# Altium PCB DigitSegment_PCB.PcbDoc
Units mm, origin at the board's own origin, x right, y up, seen from the top; angles counter-clockwise.
Board outline 152.4 x 101.6 mm, 2 copper layers (Top Layer, Bottom Layer); 121 components, 21 nets, 360 pads, 65 vias.
Unrouted connection lines stored in the file: 177.
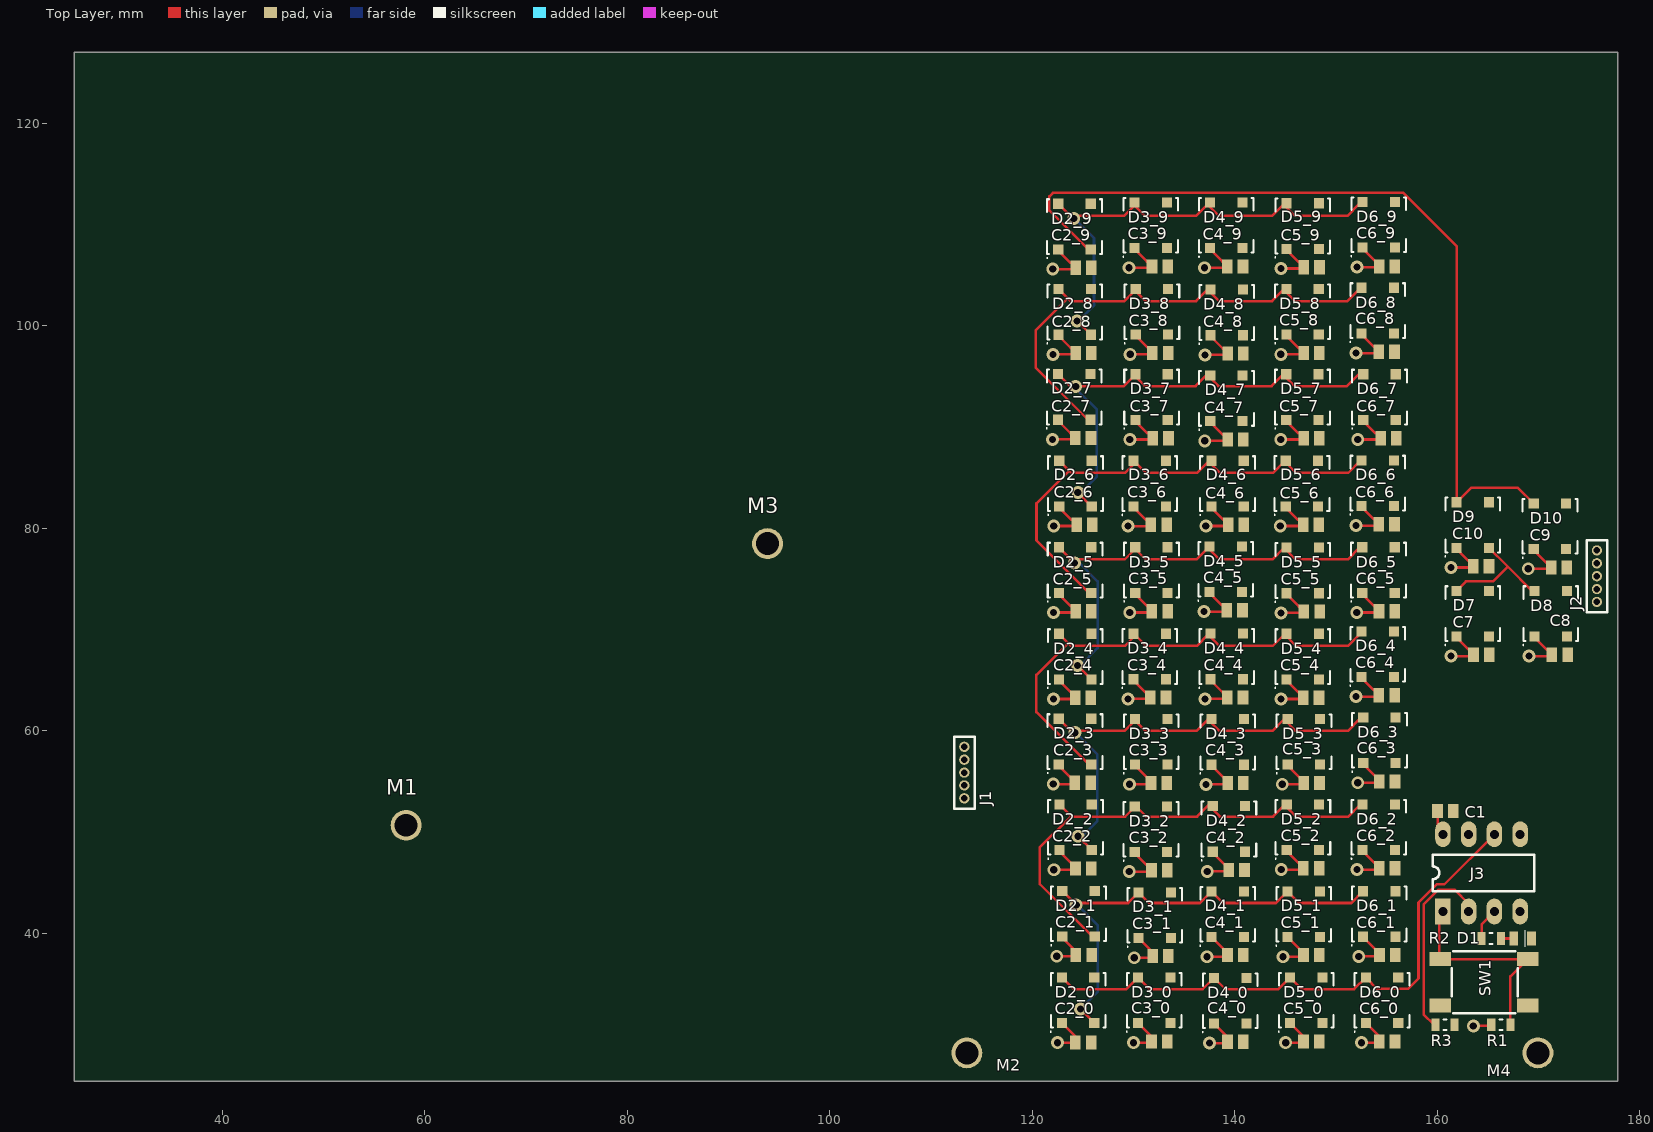
[diagram p0: Top Layer view]
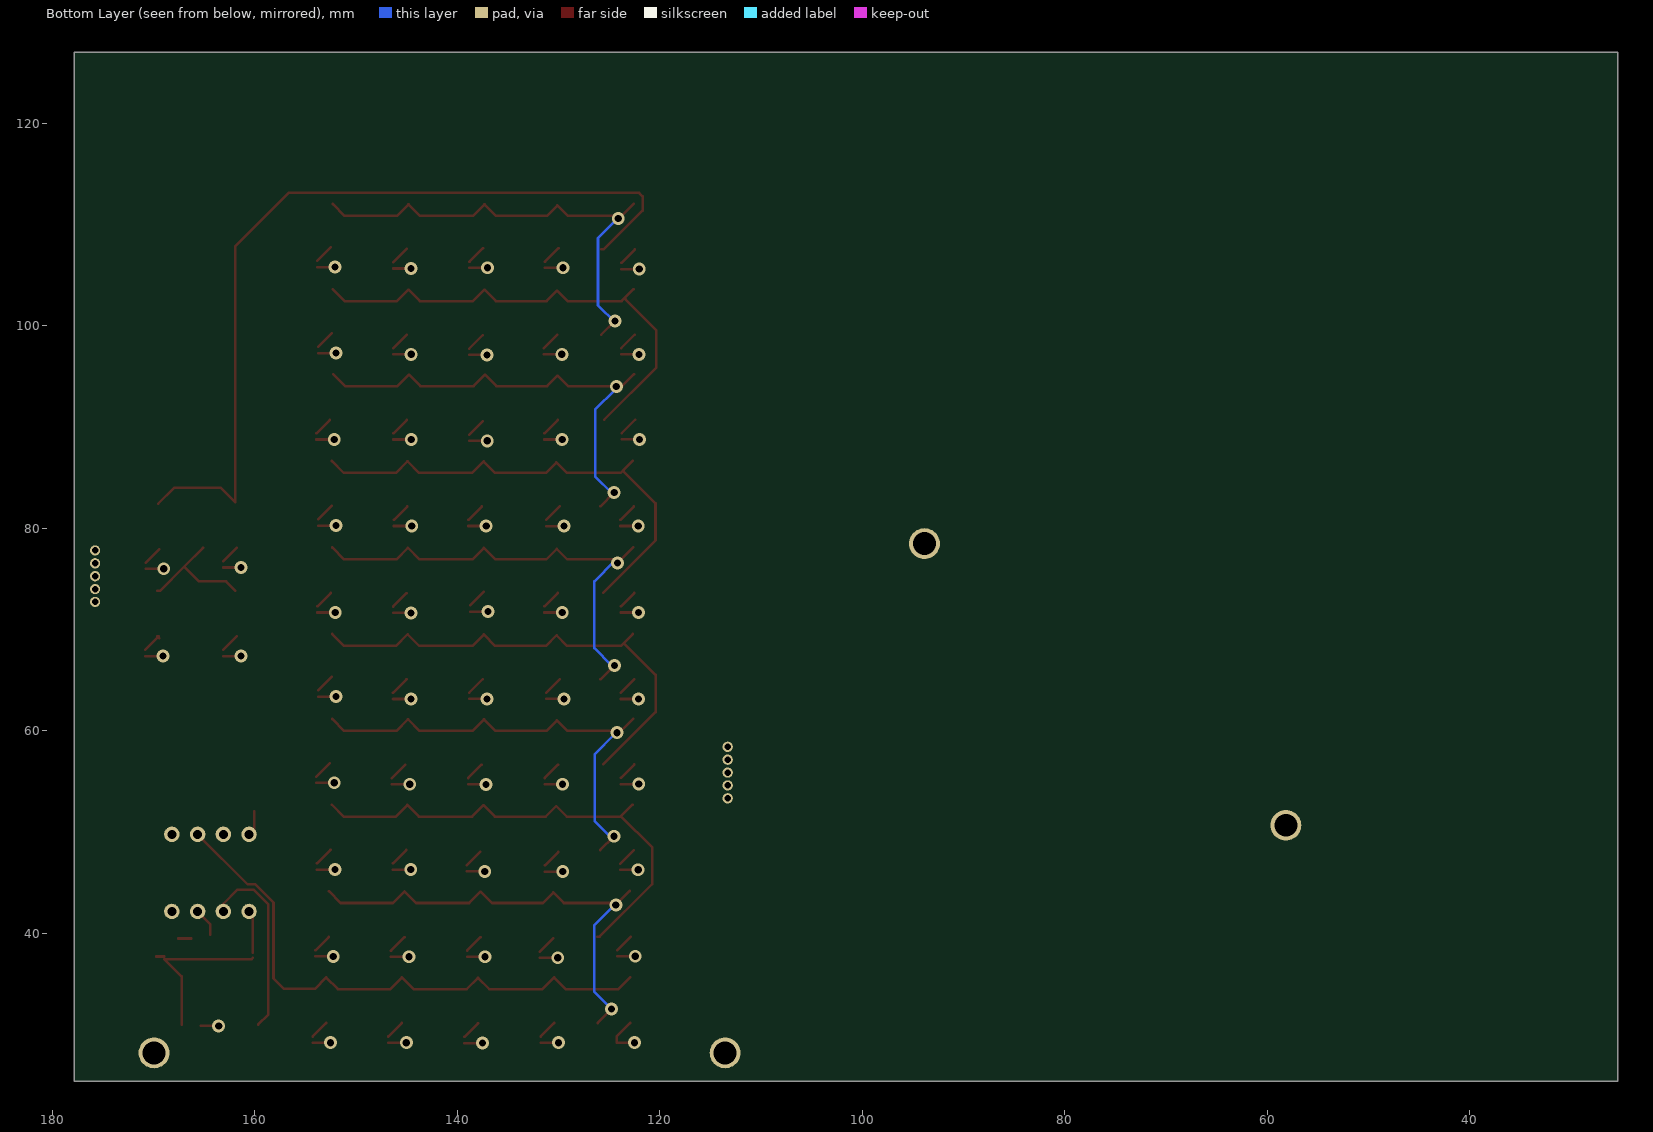
[diagram p1: Bottom Layer view, seen from below]
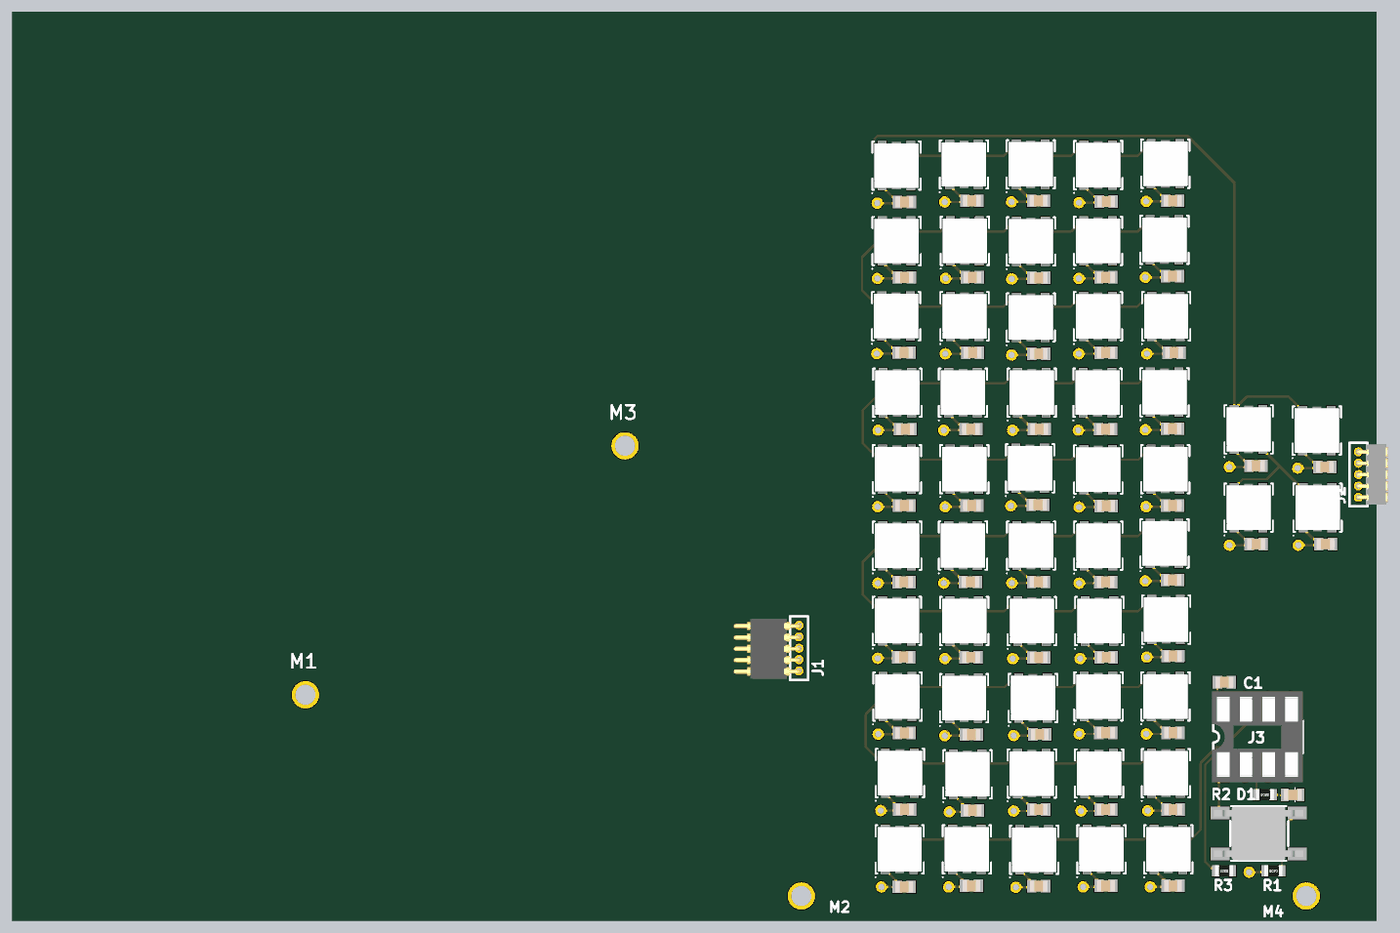
[diagram p2: 3D render of the assembled board from above, using the file's embedded part models]

## Layer stack, top to bottom
Top Solder: solder mask 0.0102, Solder Resist, Dk 3.5
Top Layer: signal copper 0.0356
Dielectric 1: dielectric 0.32, FR-4, Dk 4.8
Bottom Layer: signal copper 0.0356
Bottom Solder: solder mask 0.0102, Solder Resist, Dk 3.5

## Board outline
25.4,25.4 177.8,25.4 177.8,127 25.4,127

## Design rules (kind name [scope] priority, off if disabled: settings)
Clearance [All] p1: gap=0.254 ignorepadtopadclearanceinfootprint=FALSE except(0: Arc-Hole Track-Hole SMDPad-Hole THPad-Hole Via-Hole Fill-Hole Poly-Hole Region-Hole Text-Hole)
PolygonConnect [All] p1: connectstyle=Relief reliefconductorwidth=0.254 reliefentries=4 polygonreliefangle="90 Angle" airgapwidth=0.254
RoutingVias [All] p1: holewidth=0.711 width=1.27 viastyle="Through Hole" minholewidth=0.711 minwidth=1.27 maxholewidth=0.711 maxwidth=1.27
SolderMaskExpansion [All] p1: expansion=0.102
Width [All] p1: maxlimit=0.254 minlimit=0.254 preferedwidth=0.254
30 further rules are at their usual default settings.

## Classes and differential pairs
channel class ParralelLEDStrip: 0 1 2 3 4 5 6 7 8 9 Segment-' Segment-.
component class 9: C2_9 C3_9 C3_Segment-9 C4_9 C4_Segment-9 C5_9 C5_Segment-9 C6_9 C6_Segment-9 D2_9 D3_9 D3_Segment-9 D4_9 D4_Segment-9 D5_9 D5_Segment-9 D6_9 D6_Segment-9
component class 8: C2_8 C3_8 C3_Segment-8 C4_8 C4_Segment-8 C5_8 C5_Segment-8 C6_8 C6_Segment-8 D2_8 D3_8 D3_Segment-8 D4_8 D4_Segment-8 D5_8 D5_Segment-8 D6_8 D6_Segment-8
component class 7: C2_7 C3_7 C3_Segment-7 C4_7 C4_Segment-7 C5_7 C5_Segment-7 C6_7 C6_Segment-7 D2_7 D3_7 D3_Segment-7 D4_7 D4_Segment-7 D5_7 D5_Segment-7 D6_7 D6_Segment-7
component class 6: C2_6 C3_6 C3_Segment-6 C4_6 C4_Segment-6 C5_6 C5_Segment-6 C6_6 C6_Segment-6 D2_6 D3_6 D3_Segment-6 D4_6 D4_Segment-6 D5_6 D5_Segment-6 D6_Segment-6
component class 5: C2_5 C3_5 C3_Segment-5 C4_5 C4_Segment-5 C5_5 C5_Segment-5 C6_5 C6_Segment-5 D2_5 D3_5 D3_Segment-5 D4_5 D4_Segment-5 D5_5 D5_Segment-5 D6_5 D6_Segment-5
component class 4: C2_4 C3_4 C3_Segment-4 C4_4 C4_Segment-4 C5_4 C5_Segment-4 C6_4 C6_Segment-4 D2_4 D3_4 D3_Segment-4 D4_4 D4_Segment-4 D5_4 D5_Segment-4 D6_4 D6_Segment-4
component class 3: C2_3 C3_3 C3_Segment-3 C4_3 C4_Segment-3 C5_3 C5_Segment-3 C6_3 C6_Segment-3 D2_3 D3_3 D3_Segment-3 D4_3 D4_Segment-3 D5_3 D5_Segment-3 D6_3 D6_Segment-3
component class 2: C2_2 C3_2 C3_Segment-2 C4_2 C4_Segment-2 C5_2 C5_Segment-2 C6_2 C6_Segment-2 D2_2 D3_2 D3_Segment-2 D4_2 D4_Segment-2 D5_2 D5_Segment-2 D6_2 D6_Segment-2
component class 1: C2_1 C2_Segment-1 C3_1 C3_Segment-1 C4_1 C4_Segment-1 C5_1 C5_Segment-1 C6_1 D2_1 D3_1 D3_Segment-1 D4_1 D4_Segment-1 D5_1 D5_Segment-1 D6_1 D6_Segment-1
component class 0: C2_0 C3_0 C3_Segment-0 C4_0 C4_Segment-0 C5_0 C5_Segment-0 C6_0 C6_Segment-0 D2_0 D3_0 D3_Segment-0 D4_0 D4_Segment-0 D5_0 D5_Segment-0 D6_0 D6_Segment-0
component class DigitSegment_Schematic: C1 C7 C8 C9 C10 D1 D7 D8 D9 D10 J1 J2 J3 J? M1 M2 M3 M4 M? R1 R2 R3 R?

## Components (designator, comment, footprint, x,y, rotation, side; value= is the part's Value field where it differs from the comment)
C1 "__template_cap" C0805 160.785,52.07 r0 top
C2_0 "__template_cap" C0805 125.027,29.21 r0 top (schematic designator C2)
C2_1 "__template_cap" C0805 125.079,37.868 r0 top (schematic designator C2)
C2_2 "__template_cap" C0805 125.031,46.404 r0 top (schematic designator C2)
C2_3 "__template_cap" C0805 124.975,54.873 r0 top (schematic designator C2)
C2_4 "__template_cap" C0805 125.001,63.267 r0 top (schematic designator C2)
C2_5 "__template_cap" C0805 125.046,71.808 r0 top (schematic designator C2)
C2_6 "__template_cap" C0805 125.149,80.349 r0 top (schematic designator C2)
C2_7 "__template_cap" C0805 125.016,88.903 r0 top (schematic designator C2)
C2_8 "__template_cap" C0805 125.053,97.295 r0 top (schematic designator C2)
C2_9 "__template_cap" C0805 125.053,105.725 r0 top (schematic designator C2)
C3_0 "__template_cap" C0805 132.536,29.337 r0 top (schematic designator C3)
C3_1 "__template_cap" C0805 132.659,37.759 r0 top (schematic designator C3)
C3_2 "__template_cap" C0805 132.537,46.227 r0 top (schematic designator C3)
C3_3 "__template_cap" C0805 132.493,54.849 r0 top (schematic designator C3)
C3_4 "__template_cap" C0805 132.42,63.277 r0 top (schematic designator C3)
C3_5 "__template_cap" C0805 132.583,71.808 r0 top (schematic designator C3)
C3_6 "__template_cap" C0805 132.484,80.348 r0 top (schematic designator C3)
C3_7 "__template_cap" C0805 132.663,88.89 r0 top (schematic designator C3)
C3_8 "__template_cap" C0805 132.631,97.304 r0 top (schematic designator C3)
C3_9 "__template_cap" C0805 132.589,105.85 r0 top (schematic designator C3)
C4_0 "__template_cap" C0805 140.045,29.297 r0 top (schematic designator C4)
C4_1 "__template_cap" C0805 140.049,37.851 r0 top (schematic designator C4)
C4_2 "__template_cap" C0805 140.172,46.25 r0 top (schematic designator C4)
C4_3 "__template_cap" C0805 140.059,54.839 r0 top (schematic designator C4)
C4_4 "__template_cap" C0805 140.023,63.279 r0 top (schematic designator C4)
C4_5 "__template_cap" C0805 139.978,71.901 r0 top (schematic designator C4)
C4_6 "__template_cap" C0805 140.103,80.349 r0 top (schematic designator C4)
C4_7 "__template_cap" C0805 140.058,88.761 r0 top (schematic designator C4)
C4_8 "__template_cap" C0805 140.059,97.25 r0 top (schematic designator C4)
C4_9 "__template_cap" C0805 140.032,105.85 r0 top (schematic designator C4)
C5_0 "__template_cap" C0805 147.554,29.337 r0 top (schematic designator C5)
C5_1 "__template_cap" C0805 147.545,37.859 r0 top (schematic designator C5)
C5_2 "__template_cap" C0805 147.542,46.427 r0 top (schematic designator C5)
C5_3 "__template_cap" C0805 147.583,54.849 r0 top (schematic designator C5)
C5_4 "__template_cap" C0805 147.534,63.267 r0 top (schematic designator C5)
C5_5 "__template_cap" C0805 147.587,71.774 r0 top (schematic designator C5)
C5_6 "__template_cap" C0805 147.509,80.35 r0 top (schematic designator C5)
C5_7 "__template_cap" C0805 147.558,88.89 r0 top (schematic designator C5)
C5_8 "__template_cap" C0805 147.558,97.304 r0 top (schematic designator C5)
C5_9 "__template_cap" C0805 147.584,105.77 r0 top (schematic designator C5)
C6_0 "__template_cap" C0805 155.038,29.337 r0 top (schematic designator C6)
C6_1 "__template_cap" C0805 155.058,37.851 r0 top (schematic designator C6)
C6_2 "__template_cap" C0805 155.039,46.427 r0 top (schematic designator C6)
C6_3 "__template_cap" C0805 155.039,55 r0 top (schematic designator C6)
C6_4 "__template_cap" C0805 154.994,63.507 r0 top (schematic designator C6)
C6_5 "__template_cap" C0805 155.007,71.808 r0 top (schematic designator C6)
C6_6 "__template_cap" C0805 154.982,80.397 r0 top (schematic designator C6)
C6_7 "__template_cap" C0805 155.168,88.89 r0 top (schematic designator C6)
C6_8 "__template_cap" C0805 154.99,97.431 r0 top (schematic designator C6)
C6_9 "__template_cap" C0805 155.025,105.848 r0 top (schematic designator C6)
C7 "__template_cap" C0805 164.33,67.511 r0 top
C8 "__template_cap" C0805 172.077,67.511 r0 top
C9 "__template_cap" C0805 172,76.126 r0 top
C10 "__template_cap" C0805 164.316,76.253 r0 top
D1 "LED_LY971" 0805_Diode 168.164,39.497 r180 top
D2_0 "LED_WS2812B" 4DFN5X5_WGS2812B 124.519,33.401 r90 top (schematic designator D2)
D2_1 "LED_WS2812B" 4DFN5X5_WGS2812B 124.558,41.932 r90 top (schematic designator D2)
D2_2 "LED_WS2812B" 4DFN5X5_WGS2812B 124.269,50.468 r90 top (schematic designator D2)
D2_3 "LED_WS2812B" 4DFN5X5_WGS2812B 124.213,58.937 r90 top (schematic designator D2)
D2_4 "LED_WS2812B" 4DFN5X5_WGS2812B 124.239,67.331 r90 top (schematic designator D2)
D2_5 "LED_WS2812B" 4DFN5X5_WGS2812B 124.221,75.872 r90 top (schematic designator D2)
D2_6 "LED_WS2812B" 4DFN5X5_WGS2812B 124.26,84.413 r90 top (schematic designator D2)
D2_7 "LED_WS2812B" 4DFN5X5_WGS2812B 124.127,92.967 r90 top (schematic designator D2)
D2_8 "LED_WS2812B" 4DFN5X5_WGS2812B 124.177,101.359 r90 top (schematic designator D2)
D2_9 "LED_WS2812B" 4DFN5X5_WGS2812B 124.164,109.789 r90 top (schematic designator D2)
D3_0 "LED_WS2812B" 4DFN5X5_WGS2812B 132.028,33.401 r90 top (schematic designator D3)
D3_1 "LED_WS2812B" 4DFN5X5_WGS2812B 132.1,41.787 r90 top (schematic designator D3)
D3_2 "LED_WS2812B" 4DFN5X5_WGS2812B 131.712,50.291 r90 top (schematic designator D3)
D3_3 "LED_WS2812B" 4DFN5X5_WGS2812B 131.731,58.913 r90 top (schematic designator D3)
D3_4 "LED_WS2812B" 4DFN5X5_WGS2812B 131.595,67.341 r90 top (schematic designator D3)
D3_5 "LED_WS2812B" 4DFN5X5_WGS2812B 131.758,75.872 r90 top (schematic designator D3)
D3_6 "LED_WS2812B" 4DFN5X5_WGS2812B 131.595,84.412 r90 top (schematic designator D3)
D3_7 "LED_WS2812B" 4DFN5X5_WGS2812B 131.774,92.954 r90 top (schematic designator D3)
D3_8 "LED_WS2812B" 4DFN5X5_WGS2812B 131.806,101.368 r90 top (schematic designator D3)
D3_9 "LED_WS2812B" 4DFN5X5_WGS2812B 131.7,109.914 r90 top (schematic designator D3)
D4_0 "LED_WS2812B" 4DFN5X5_WGS2812B 139.537,33.361 r90 top (schematic designator D4)
D4_1 "LED_WS2812B" 4DFN5X5_WGS2812B 139.287,41.879 r90 top (schematic designator D4)
D4_2 "LED_WS2812B" 4DFN5X5_WGS2812B 139.41,50.314 r90 top (schematic designator D4)
D4_3 "LED_WS2812B" 4DFN5X5_WGS2812B 139.297,58.903 r90 top (schematic designator D4)
D4_4 "LED_WS2812B" 4DFN5X5_WGS2812B 139.198,67.343 r90 top (schematic designator D4)
D4_5 "LED_WS2812B" 4DFN5X5_WGS2812B 139.089,75.965 r90 top (schematic designator D4)
D4_6 "LED_WS2812B" 4DFN5X5_WGS2812B 139.278,84.413 r90 top (schematic designator D4)
D4_7 "LED_WS2812B" 4DFN5X5_WGS2812B 139.169,92.825 r90 top (schematic designator D4)
D4_8 "LED_WS2812B" 4DFN5X5_WGS2812B 139.183,101.314 r90 top (schematic designator D4)
D4_9 "LED_WS2812B" 4DFN5X5_WGS2812B 139.156,109.922 r90 top (schematic designator D4)
D5_0 "LED_WS2812B" 4DFN5X5_WGS2812B 147.046,33.401 r90 top (schematic designator D5)
D5_1 "LED_WS2812B" 4DFN5X5_WGS2812B 146.796,41.887 r90 top (schematic designator D5)
D5_2 "LED_WS2812B" 4DFN5X5_WGS2812B 146.717,50.491 r90 top (schematic designator D5)
D5_3 "LED_WS2812B" 4DFN5X5_WGS2812B 146.821,58.913 r90 top (schematic designator D5)
D5_4 "LED_WS2812B" 4DFN5X5_WGS2812B 146.709,67.331 r90 top (schematic designator D5)
D5_5 "LED_WS2812B" 4DFN5X5_WGS2812B 146.698,75.838 r90 top (schematic designator D5)
D5_6 "LED_WS2812B" 4DFN5X5_WGS2812B 146.62,84.414 r90 top (schematic designator D5)
D5_7 "LED_WS2812B" 4DFN5X5_WGS2812B 146.669,92.954 r90 top (schematic designator D5)
D5_8 "LED_WS2812B" 4DFN5X5_WGS2812B 146.682,101.368 r90 top (schematic designator D5)
D5_9 "LED_WS2812B" 4DFN5X5_WGS2812B 146.695,109.842 r90 top (schematic designator D5)
D6_0 "LED_WS2812B" 4DFN5X5_WGS2812B 154.53,33.401 r90 top (schematic designator D6)
D6_1 "LED_WS2812B" 4DFN5X5_WGS2812B 154.258,41.915 r90 top (schematic designator D6)
D6_2 "LED_WS2812B" 4DFN5X5_WGS2812B 154.214,50.491 r90 top (schematic designator D6)
D6_3 "LED_WS2812B" 4DFN5X5_WGS2812B 154.277,59.064 r90 top (schematic designator D6)
D6_4 "LED_WS2812B" 4DFN5X5_WGS2812B 154.105,67.571 r90 top (schematic designator D6)
D6_5 "LED_WS2812B" 4DFN5X5_WGS2812B 154.182,75.872 r90 top (schematic designator D6)
D6_6 "LED_WS2812B" 4DFN5X5_WGS2812B 154.106,84.461 r90 top (schematic designator D6)
D6_7 "LED_WS2812B" 4DFN5X5_WGS2812B 154.279,92.954 r90 top (schematic designator D6)
D6_8 "LED_WS2812B" 4DFN5X5_WGS2812B 154.101,101.495 r90 top (schematic designator D6)
D6_9 "LED_WS2812B" 4DFN5X5_WGS2812B 154.207,109.984 r90 top (schematic designator D6)
D7 "LED_WS2812B" 4DFN5X5_WGS2812B 163.492,71.575 r90 top
D8 "LED_WS2812B" 4DFN5X5_WGS2812B 171.188,71.575 r90 top
D9 "LED_WS2812B" 4DFN5X5_WGS2812B 163.491,80.317 r90 top
D10 "LED_WS2812B" 4DFN5X5_WGS2812B 171.111,80.19 r90 top
J1 "CONN_1X5_MALE_POGO" CONN_1X5_MALE_POGO 113.284,55.88 r90 top
J2 "CONN_1X5_FEMALE_POGO" CONN_1X5_FEMALE_POGO 175.75,75.27 r270 top
J3 "ATTINY85 DIP" DIP8 158.544,40.164 r90 top
M1 "SCREW_#2-56_5/16" #2_HOLE 58.166,50.673 r0 top
M2 "SCREW_#2-56_5/16" #2_HOLE 113.538,28.194 r0 top
M3 "SCREW_#2-56_5/16" #2_HOLE 93.853,78.486 r0 top
M4 "SCREW_#2-56_5/16" #2_HOLE 169.926,28.194 r0 top
R1 "__template_resistor" R0805 166.259,30.988 r180 top
R2 "__template_resistor" R0805 165.309,39.497 r180 top
R3 "__template_resistor" R0805 160.75,30.988 r180 top
SW1 "SWITCH_FSM4JSMATR" SWITCH_FSM4JSMATR 164.608,35.179 r270 top

## Footprints (in the part's own frame and the unit in brackets; to place one, negate y for a bottom-side part, rotate by r counter-clockwise, add the part's x,y. Pads: shape width x height; smd on the part's side, far side on the other; paste and mask are expansions set on the pad)
4DFN5X5_WGS2812B [mm] "WS2812B LED 4DFN5X5"
  rect 1x1 smd: 1(-2.25,1.6) 2(-2.25,-1.6) 3(2.25,-1.6) 4(2.25,1.6)
  silkscreen extent -3.15,-2.7 2.7,2.75, body extent -2.68,-2.47 2.67,2.48, height 2
0805_Diode [mm]
  rect 0.85x1.4 smd: 1(-1.129,0) 2(0.621,0)
  silkscreen extent -0.5,-0.8 -0.5,0.8, body extent -1.25,-0.62 0.75,0.63, height 0.59
#2_HOLE [mil] "Standard #2 Clearance Hole"
  round 120 hole 89: HOLE(0,0)
C0805 [mm] "Chip Capacitor, 2-Leads, Body 2.0x1.3mm, IPC High Density"
  rect 1.05x1.4 smd: 1(-0.775,0) 2(0.775,0)
  body extent -1,-0.62 1,0.63, height 0.6
CONN_1X5_FEMALE_POGO [mil]
  round 40 hole 25: 1(-100,0) 2(-50,0) 3(0,0) 4(50,0) 5(100,0)
  silkscreen extent -140,-40 140,40, body extent -132,-10 132,130, height 97
CONN_1X5_MALE_POGO [mil]
  round 40 hole 25: 1(-100,0) 2(-50,0) 3(0,0) 4(50,0) 5(100,0)
  silkscreen extent -140,-40 140,40, body extent -135,-8 130,288, height 97
DIP8 [mm]
  rect 2.54x1.524 / inner round 1.524 / far side round 1.524 hole 0.889: 1(2,-2)
  oval 2.54x1.524 / inner round 1.524 / far side round 1.524 hole 0.889: 2(2,-4.54) 3(2,-7.08) 4(2,-9.62) 5(9.62,-9.62) 6(9.62,-7.08) 7(9.62,-4.54) 8(9.62,-2)
  silkscreen extent 4,-11 7.62,-1, body extent 0.73,-11 10.89,-0.84, height 5
R0805 [mm] "Chip Resistor, 2-Leads, Body 2.0x1.3mm, IPC High Density"
  rect 0.8x1.25 smd: 1(-0.95,0) 2(0.95,0)
  silkscreen extent -0.15,-0.53 0.15,0.53, body extent -1,-0.62 1,0.63, height 0.6
SWITCH_FSM4JSMATR [mil]
  rect 55x83 smd: 1(90,170) 1(90,-170) 2(-90,170) 2(-90,-170)
  silkscreen extent -120,-125 120,130, body extent -118,-197 118,197, height 197

## Part data
C1 C2_0 C2_1 C2_2 C2_3 C2_4 C2_5 C2_6 C2_7 C2_8 C2_9 C3_0 C3_1 C3_2 C3_3 C3_4 C3_5 C3_6 C3_7 C3_8 C3_9 C4_0 C4_1 C4_2 C4_3 C4_4 C4_5 C4_6 C4_7 C4_8 C4_9 C5_0 C5_1 C5_2 C5_3 C5_4 C5_5 C5_6 C5_7 C5_8 C5_9 C6_0 C6_1 C6_2 C6_3 C6_4 C6_5 C6_6 C6_7 C6_8 C6_9 C7 C8 C9 C10: library part "CAP CER 10000PF 50V X7R 0805", Capacitance (shorthand)=10000pF, Capacitance - pF (Machine readable)=10000, Dielectric=X7R, Manufacturer="Murata Electronics North America", Rated Voltage=50V, Supplier Part Number 1=490-1664-1-ND, type=capacitor
D1: "LED 0805 GREEN 20MA", Color=Green, Current - Test=20mA, Lens Color=White, Manufacturer="OSRAM Opto Semiconductors Inc", Manufacturer Part Number="LG R971-KN-1", Millicandela Rating=26.05mcd, Package / Case="0805 (2012 Metric)", Supplier Part Number 1=475-1410-1-ND, Voltage - Forward (Vf) (Typ)=2.2V, Category=Optoelectronics, ComponentLink1Description=http://www.osram-os.com/Graphics/XPic9/00078860_0.pdf, ComponentLink1URL=http://www.osram-os.com/Graphics/XPic9/00078860_0.pdf, Height (Max)=0.80mm, Lens Style/Size="Rectangle with Flat Top, 1.30mm x 1.25mm", Lens Transparency=Diffused, Mounting Type="Surface Mount", Packaging="Cut Tape (CT)", Pricing 1="1=0.08, 10=0.069, 100=0.0548, 250=0.04796, 500=0.04384 (USD)", RoHS="RoHS Compliant", Size / Dimension="2.00mm L x 1.25mm W", Stock 1=89733, Supplier 1=Digi-Key, Viewing Angle=160°, Wavelength - Dominant=570nm, Wavelength - Peak=572nm
D2_0 D2_1 D2_2 D2_3 D2_4 D2_5 D2_6 D2_7 D2_8 D2_9 D3_0 D3_1 D3_2 D3_3 D3_4 D3_5 D3_6 D3_7 D3_8 D3_9 D4_0 D4_1 D4_2 D4_3 D4_4 D4_5 D4_6 D4_7 D4_8 D4_9 D5_0 D5_1 D5_2 D5_3 D5_4 D5_5 D5_6 D5_7 D5_8 D5_9 D6_0 D6_1 D6_2 D6_3 D6_4 D6_5 D6_6 D6_7 D6_8 D6_9 D7 D8 D9 D10: "LED RGB WS2812B"
J1: "RIGHT ANGLE .050\" GRID SLC"
J2: ".050\" RA TARGET CONNECTOR"
J3: library part CONN_DIP_8, "CONN IC SOCKET 8POS DIP TIN", Contact Resistance="30 mOhm", Manufacturer="Assmann WSW Components", Manufacturer Part Number="A 08-LC-TT", Material Flammability Rating="UL94 V-0", Operating Temperature="-55°C ~ 85°C", Supplier Part Number 1=AE9986-ND, Category="Connectors, Interconnects", ComponentLink1Description=http://www.assmann-wsw.com/fileadmin/datasheets/ASS_0810_CO.pdf, ComponentLink1URL=http://www.assmann-wsw.com/fileadmin/datasheets/ASS_0810_CO.pdf, Contact Finish - Mating=Tin, Contact Finish - Post=Tin, Contact Finish Thickness - Mating=-, Contact Finish Thickness - Post=-, Contact Material - Mating="Phosphor Bronze", Contact Material - Post="Phosphor Bronze", Features="Open Frame", Housing Material="Polybutylene Terephthalate (PBT)", Mounting Type="Through Hole", Number of Positions or Pins (Grid)="8 (2 x 4)", Packaging=Tube, Part Status=Active, Pitch - Mating="0.100\" (2.54mm)", Pitch - Post="0.100\" (2.54mm)", Pricing 1="1=0.18, 10=0.173, 25=0.1472, 50=0.1288, 100=0.1196, 250=0.1058, 500=0.1012, 1000=0.0828, 2500=0.0759 (USD)", RoHS="RoHS Compliant", Stock 1=124929, Supplier 1=Digi-Key, Termination=Solder, Termination Post Length="0.124\" (3.15mm)", type="DIP, 0.3\" (7.62mm) Row Spacing"
M1 M2 M3 M4: "#2-56 Button Head Screw, 5/16\""
R1 R2 R3: library part "RES SMD 1K OHM 1% 1/8W 0805", Manufacturer=Yageo, Manufacturer Part Number=RC0805FR-071KL, Operating Temperature="-55°C ~ 155°C", Power (Watts)="0.125W, 1/8W", Resistance="1 k?", Resistance (Sortable)=1000, Supplier Part Number 1=311-1.00KCRCT-ND, Temperature Coefficient=±100ppm/°C, tolerance=±1%, Datasheets=http://www.yageo.com/documents/recent/PYu-RC_Group_51_RoHS_L_9.pdf, Image=//media.digikey.com/Renders/Yageo%20Renders/0805-(2012-Metric).jpg, Supplier 1=Digikey
SW1: "SWITCH TACTILE SPST-NO 0.05A 12V", Contact Rating @ Voltage="0.05A @ 12VDC", Illumination Type, Color=-, Manufacturer="TE Connectivity", Manufacturer Part Number=FSM4JSMATR, Operating Force=160gf, Operating Temperature="-35°C ~ 85°C", Supplier Part Number 1=450-1759-1-ND, Actuator Height off PCB, from Pins=5.00mm, Actuator Material="Polyphenylene Sulfide (PPS)", Actuator Orientation="Top Actuated", Actuator Type=Standard, Category=Switches, Circuit=SPST-NO, ComponentLink1Description=Datasheet, ComponentLink1URL=http://www.te.com/commerce/DocumentDelivery/DDEController?Action=srchrtrv&DocNm=2-1437565-7&DocType=Customer+Drawing&DocLang=English, Features=-, Illumination=Non-Illuminated, Illumination Voltage (Nominal)=-, Ingress Protection=-, Mechanical Life="100,000 Cycles", Mounting Type="Surface Mount", Outline="6.00mm x 6.00mm", Packaging="Cut Tape (CT)", Pricing 1="1=0.36, 10=0.34, 25=0.2912, 50=0.2474, 100=0.2377, 250=0.21344, 500=0.20374 (USD)", RoHS="RoHS Compliant", Stock 1=24144, Supplier 1=Digi-Key, Switch Function=Off-Mom, Switch Travel=0.25mm, Termination Style="Gull Wing"

## Via types
v1: diameter 1.27, hole 0.711, Top Layer to Bottom Layer, 65 vias

## Nets (pads, with @x,y where several pads share a name; then routed paths per layer and width w, separated by ;. In a path a pad name is that pad's centre, name@x,y a point inside that pad or via, vN(x,y) a via of type N, cw(c..) or ccw(c..) an arc to the next point about the centre after c; other vN are vias at no path point)
+5: C1.1 C2_0.1 C2_1.1 C2_2.1 C2_3.1 C2_4.1 C2_5.1 C2_6.1 C2_7.1 C2_8.1 C2_9.1 C3_0.1 C3_1.1 C3_2.1 C3_3.1 C3_4.1 C3_5.1 C3_6.1 C3_7.1 C3_8.1 C3_9.1 C4_0.1 C4_1.1 C4_2.1 C4_3.1 C4_4.1 C4_5.1 C4_6.1 C4_7.1 C4_8.1 C4_9.1 C5_0.1 C5_1.1 C5_2.1 C5_3.1 C5_4.1 C5_5.1 C5_6.1 C5_7.1 C5_8.1 C5_9.1 C6_0.1 C6_1.1 C6_2.1 C6_3.1 C6_4.1 C6_5.1 C6_6.1 C6_7.1 C6_8.1 C6_9.1 C7.1 C8.1 C9.1 C10.1 D2_0.1 D2_1.1 D2_2.1 D2_3.1 D2_4.1 D2_5.1 D2_6.1 D2_7.1 D2_8.1 D2_9.1 D3_0.1 D3_1.1 D3_2.1 D3_3.1 D3_4.1 D3_5.1 D3_6.1 D3_7.1 D3_8.1 D3_9.1 D4_0.1 D4_1.1 D4_2.1 D4_3.1 D4_4.1 D4_5.1 D4_6.1 D4_7.1 D4_8.1 D4_9.1 D5_0.1 D5_1.1 D5_2.1 D5_3.1 D5_4.1 D5_5.1 D5_6.1 D5_7.1 D5_8.1 D5_9.1 D6_0.1 D6_1.1 D6_2.1 D6_3.1 D6_4.1 D6_5.1 D6_6.1 D6_7.1 D6_8.1 D6_9.1 D7.1 D8.1 D9.1 D10.1 J1.1 J2.1 J3.8 R1.2 | length 202.3
  Top Layer w0.254: v1(121.981,88.776) C2_7.1@123.746,88.776 ; v1(122.018,105.598) C2_9.1@123.783,105.598 ; v1(122.031,97.168) C2_8.1@123.796,97.168 ; v1(122.067,54.746) C2_3.1@123.832,54.746 ; v1(122.075,71.681) C2_5.1@123.84,71.681 ; v1(122.093,63.14) C2_4.1@123.858,63.14 ; v1(122.114,80.222) C2_6.1@123.879,80.222 ; v1(122.123,46.277) C2_2.1@123.888,46.277 ; v1(122.412,37.741) C2_1.1@124.177,37.741 ; D2_7.1@122.413,90.717 C2_7.1@123.746,89.384 ; D2_9.1@122.45,107.539 C2_9.1@123.783,106.206 ; D2_8.1@122.463,99.109 C2_8.1@123.796,97.776 ; v1(122.487,29.21) C2_0.1 124.252,29.818 D2_0.1 ; D2_3.1@122.499,56.687 C2_3.1@123.832,55.354 ; D2_5.1@122.507,73.622 C2_5.1@123.84,72.289 ; D2_4.1@122.525,65.081 C2_4.1@123.858,63.748 ; D2_6.1@122.546,82.163 C2_6.1@123.879,80.83 ; D2_2.1@122.555,48.218 C2_2.1@123.888,46.885 ; D2_1.1@122.844,39.682 C2_1.1@124.177,38.349 ; v1(129.449,63.15) C3_4.1@131.214,63.15 ; v1(129.449,80.221) C3_6.1@131.214,80.221 ; v1(129.554,105.723) C3_9.1@131.319,105.723 ; v1(129.566,46.1) C3_2.1@131.331,46.1 ; v1(129.585,54.722) C3_3.1@131.35,54.722 ; v1(129.612,71.681) C3_5.1@131.377,71.681 ; v1(129.628,88.763) C3_7.1@131.393,88.763 ; v1(129.66,97.177) C3_8.1@131.425,97.177 ; D3_4.1@129.881,65.091 C3_4.1@131.214,63.758 ; D3_6.1@129.881,82.162 C3_6.1@131.214,80.829 ; D3_9.1@129.986,107.664 C3_9.1@131.319,106.331 ; v1(129.996,29.21) C3_0.1@131.761,29.21 ; D3_2.1@129.998,48.041 C3_2.1@131.331,46.708 ; D3_3.1@130.017,56.663 C3_3.1@131.35,55.33 ; D3_5.1@130.044,73.622 C3_5.1@131.377,72.289 ; D3_7.1@130.06,90.704 C3_7.1@131.393,89.371 ; v1(130.068,37.596) C3_1.1@131.833,37.596 ; D3_8.1@130.092,99.118 C3_8.1@131.425,97.785 ; D3_0.1 C3_0.1@131.761,29.818 ; D3_1.1 C3_1.1@131.833,38.204 ; v1(136.943,71.774) C4_5.1@138.708,71.774 ; v1(137.01,105.731) C4_9.1@138.775,105.731 ; v1(137.023,88.634) C4_7.1@138.788,88.634 ; v1(137.037,97.123) C4_8.1@138.802,97.123 ; v1(137.052,63.152) C4_4.1@138.817,63.152 ; v1(137.132,80.222) C4_6.1@138.897,80.222 ; v1(137.151,54.712) C4_3.1@138.916,54.712 ; v1(137.255,37.688) C4_1.1@139.02,37.688 ; v1(137.264,46.123) C4_2.1@139.029,46.123 ; D4_5.1@137.375,73.715 C4_5.1@138.708,72.382 ; D4_9.1@137.442,107.672 C4_9.1@138.775,106.339 ; D4_7.1@137.455,90.575 C4_7.1@138.788,89.242 ; D4_8.1@137.469,99.064 C4_8.1@138.802,97.731 ; D4_4.1@137.484,65.093 C4_4.1@138.817,63.76 ; v1(137.505,29.17) C4_0.1@139.27,29.17 ; D4_6.1@137.564,82.163 C4_6.1@138.897,80.83 ; D4_3.1@137.583,56.653 C4_3.1@138.916,55.32 ; D4_1.1 C4_1.1@139.02,38.296 ; D4_2.1@137.696,48.064 C4_2.1@139.029,46.731 ; D4_0.1 C4_0.1@139.27,29.778 ; v1(144.474,80.223) C5_6.1@146.239,80.223 ; v1(144.523,88.763) C5_7.1@146.288,88.763 ; v1(144.536,97.177) C5_8.1@146.301,97.177 ; v1(144.549,105.651) C5_9.1@146.314,105.651 ; v1(144.552,71.647) C5_5.1@146.317,71.647 ; v1(144.563,63.14) C5_4.1@146.328,63.14 ; v1(144.571,46.3) C5_2.1@146.336,46.3 ; v1(144.675,54.722) C5_3.1@146.44,54.722 ; v1(144.764,37.696) C5_1.1@146.529,37.696 ; D5_6.1@144.906,82.164 C5_6.1@146.239,80.831 ; D5_7.1@144.955,90.704 C5_7.1@146.288,89.371 ; D5_8.1@144.968,99.118 C5_8.1@146.301,97.785 ; D5_9.1@144.981,107.592 C5_9.1@146.314,106.259 ; D5_5.1@144.984,73.588 C5_5.1@146.317,72.255 ; D5_4.1@144.995,65.081 C5_4.1@146.328,63.748 ; D5_2.1@145.003,48.241 C5_2.1@146.336,46.908 ; v1(145.014,29.21) C5_0.1@146.779,29.21 ; D5_3.1@145.107,56.663 C5_3.1@146.44,55.33 ; D5_1.1 C5_1.1@146.529,38.304 ; D5_0.1 C5_0.1@146.779,29.818 ; v1(151.955,97.304) C6_8.1@153.72,97.304 ; v1(151.959,63.38) C6_4.1@153.724,63.38 ; v1(151.96,80.27) C6_6.1@153.725,80.27 ; v1(152.036,71.681) C6_5.1@153.801,71.681 ; v1(152.061,105.793) C6_9.1@153.826,105.793 ; v1(152.068,46.3) C6_2.1@153.833,46.3 ; v1(152.131,54.873) C6_3.1@153.896,54.873 ; v1(152.133,88.763) C6_7.1@153.898,88.763 ; v1(152.226,37.724) C6_1.1@153.991,37.724 ; D6_8.1@152.387,99.245 C6_8.1@153.72,97.912 ; D6_4.1@152.391,65.321 C6_4.1@153.724,63.988 ; D6_6.1@152.392,82.211 C6_6.1@153.725,80.878 ; D6_5.1@152.468,73.622 C6_5.1@153.801,72.289 ; D6_9.1@152.493,107.734 C6_9.1@153.826,106.401 ; v1(152.498,29.21) C6_0.1@154.263,29.21 ; D6_2.1@152.5,48.241 C6_2.1@153.833,46.908 ; D6_3.1@152.563,56.814 C6_3.1@153.896,55.481 ; D6_7.1@152.565,90.704 C6_7.1@153.898,89.371 ; D6_1.1 C6_1.1@153.991,38.332 ; D6_0.1 C6_0.1@154.263,29.818 ; C1.1 160.01,50.318 J3.8 ; v1(161.345,76.126) C10.1@163.11,76.126 ; v1(161.346,67.384) C7.1@163.111,67.384 ; D9.1@161.777,78.067 C10.1@163.11,76.734 ; D7.1@161.778,69.325 C7.1@163.111,67.992 ; v1(163.544,30.861) R1.2@165.309,30.861 ; v1(168.965,75.999) C9.1@170.73,75.999 ; v1(169.042,67.384) C8.1@170.807,67.384 ; D8.1@169.397,69.134 D8.1 ; D10.1@169.397,77.94 C9.1@170.73,76.607 ; D8.1@169.474,69.325 C8.1@170.807,67.992
GND: C1.2 C2_0.2 C2_1.2 C2_2.2 C2_3.2 C2_4.2 C2_5.2 C2_6.2 C2_7.2 C2_8.2 C2_9.2 C3_0.2 C3_1.2 C3_2.2 C3_3.2 C3_4.2 C3_5.2 C3_6.2 C3_7.2 C3_8.2 C3_9.2 C4_0.2 C4_1.2 C4_2.2 C4_3.2 C4_4.2 C4_5.2 C4_6.2 C4_7.2 C4_8.2 C4_9.2 C5_0.2 C5_1.2 C5_2.2 C5_3.2 C5_4.2 C5_5.2 C5_6.2 C5_7.2 C5_8.2 C5_9.2 C6_0.2 C6_1.2 C6_2.2 C6_3.2 C6_4.2 C6_5.2 C6_6.2 C6_7.2 C6_8.2 C6_9.2 C7.2 C8.2 C9.2 C10.2 D1.1 D2_0.3 D2_1.3 D2_2.3 D2_3.3 D2_4.3 D2_5.3 D2_6.3 D2_7.3 D2_8.3 D2_9.3 D3_0.3 D3_1.3 D3_2.3 D3_3.3 D3_4.3 D3_5.3 D3_6.3 D3_7.3 D3_8.3 D3_9.3 D4_0.3 D4_1.3 D4_2.3 D4_3.3 D4_4.3 D4_5.3 D4_6.3 D4_7.3 D4_8.3 D4_9.3 D5_0.3 D5_1.3 D5_2.3 D5_3.3 D5_4.3 D5_5.3 D5_6.3 D5_7.3 D5_8.3 D5_9.3 D6_0.3 D6_1.3 D6_2.3 D6_3.3 D6_4.3 D6_5.3 D6_6.3 D6_7.3 D6_8.3 D6_9.3 D7.3 D8.3 D9.3 D10.3 J1.5 J2.5 J3.4 SW1.1
LED: J3.3 R2.2 | length 2.8
  Top Layer w0.254: R2.2@164.359,39.878 164.359,40.899 J3.3
NetD1_2: D1.2 R2.1 | length 1.3
  Top Layer w0.254: R2.1 D1.2
NetD7_4: D7.4 D8.4 D9.2 | length 12.3
  Top Layer w0.254: D7.4 162.817,74.75 165.499,74.75 166.908,76.159 166.908,76.25 ; D9.2 166.908,76.25 ; D8.4 169.333,73.825 166.908,76.25
POS-IN: J2.4 J3.2 R3.2 | length 18.7
  Top Layer w0.254: R3.2@159.65,31 158.639,32.011 158.639,42.839 160.123,44.323 161.687,44.323 163.084,42.926 J3.2
POS-OUT: J1.4 R3.1
RESET: J3.1 R1.1 SW1.2 | length 21
  Top Layer w0.254: SW1.2@160.163,37.592 160.29,37.465 168.926,37.465 167.209,35.748 R1.1 ; SW1.2@160.163,38.1 160.163,41.783 J3.1 ; SW1.2@168.926,37.719 SW1.2@169.688,37.719
RGB-IN: D2_0.4 D3_0.4 D4_0.4 D5_0.4 D6_0.4 J3.6 | length 57.7
  Top Layer w0.254: D2_0.4 124.07,34.5 129.277,34.5 D3_0.4 131.579,34.5 136.826,34.5 D4_0.4 139.048,34.5 144.295,34.5 D5_0.4 146.597,34.5 151.779,34.5 D6_0.4 154.054,34.527 157.098,34.527 158.131,35.56 158.131,43.05 159.913,44.831 160.671,44.831 J3.6
RGB-IN_1: D2_0.2 D2_1.4 D3_1.4 D4_1.4 D5_1.4 D6_1.4 | length 47.3
  Top Layer w0.254: D2_1.4 124.14,43 129.463,43 D3_1.4 131.537,43 136.558,43 D4_1.4 138.816,43 144.059,43 D5_1.4 146.333,43 151.493,43 D6_1.4 ; v1(124.75,32.52) D2_0.2
  Bottom Layer w0.254: v1(124.327,42.813) 124.464,42.813 126.456,40.821 126.456,34.226 v1(124.75,32.52)
RGB-IN_2: D2_1.2 D2_2.4 D3_2.4 D4_2.4 D5_2.4 D6_2.4 | length 49
  Top Layer w0.254: D2_2.4 123.795,51.592 ; D2_1.2 125.919,39.682 120.75,44.851 120.75,48.514 123.795,51.559 123.795,51.592 ; D6_2.4@152.369,52.701 151.204,51.536 146.044,51.536 144.907,52.673 143.77,51.536 138.527,51.536 137.398,52.665 136.269,51.536 131.248,51.536 130.211,52.573 129.174,51.536 123.851,51.536 123.795,51.592
RGB-IN_3: D2_2.2 D2_3.4 D3_3.4 D4_3.4 D5_3.4 D6_3.4 | length 49.3
  Top Layer w0.254: v1(124.213,59.818) 123.982,59.818 D2_3.4 123.795,60.005 129.118,60.005 130.155,61.042 131.192,60.005 136.213,60.005 137.342,61.134 138.471,60.005 143.714,60.005 144.851,61.142 145.988,60.005 151.148,60.005 D6_3.4@152.313,61.17 ; v1(124.5,49.587) D2_2.2
  Bottom Layer w0.254: v1@124.434,59.676 126.426,57.684 126.426,51.089 v1@124.72,49.383
RGB-IN_4: D2_3.2 D2_4.4 D3_4.4 D4_4.4 D5_4.4 D6_4.4 | length 48.7
  Top Layer w0.254: D2_4.4 123.821,68.399 129.144,68.399 130.181,69.436 131.218,68.399 136.239,68.399 137.368,69.528 138.497,68.399 143.74,68.399 144.877,69.536 146.014,68.399 151.174,68.399 D6_4.4@152.339,69.564 ; 123.45,68.564 120.405,65.519 120.405,61.856 D2_3.2@125.574,56.687
RGB-IN_5: D2_4.2 D2_5.4 D3_5.4 D4_5.4 D5_5.4 D6_5.4 | length 49.4
  Top Layer w0.254: v1(124.177,76.566) D2_5.4 123.803,76.94 129.126,76.94 130.163,77.977 131.2,76.94 136.221,76.94 137.349,78.069 138.478,76.94 143.722,76.94 144.859,78.077 145.996,76.94 151.156,76.94 D6_5.4@152.321,78.105 ; v1(124.47,66.45) D2_4.2
  Bottom Layer w0.254: v1@124.455,76.758 126.447,74.766 126.447,68.171 v1@124.741,66.465
RGB-IN_6: D2_5.2 D2_6.4 D3_6.4 D4_6.4 D5_6.4 D6_6.4 | length 49
  Top Layer w0.254: D2_6.4 123.573,85.75 ; D2_5.2@125.582,73.622 120.413,78.791 120.413,82.454 123.573,85.614 123.573,85.75 ; D6_6.4@152.36,86.646 151.195,85.481 146.035,85.481 144.898,86.618 143.761,85.481 138.518,85.481 137.389,86.61 136.26,85.481 131.239,85.481 130.202,86.518 129.165,85.481 124,85.481 123.842,85.481 123.573,85.75
RGB-IN_7: D2_6.2 D2_7.4 D3_7.4 D4_7.4 D5_7.4 D6_7.4 | length 49.4
  Top Layer w0.254: v1(124.278,94) 123.744,94 D2_7.4 123.709,94.035 129.032,94.035 130.069,95.072 131.106,94.035 136.127,94.035 137.256,95.164 138.385,94.035 143.628,94.035 144.765,95.172 145.902,94.035 151.062,94.035 D6_7.4@152.227,95.2 ; v1(124.491,83.532) D2_6.2
  Bottom Layer w0.254: v1@124.372,93.704 126.364,91.712 126.364,85.117 v1@124.658,83.411
RGB-IN_8: D2_7.2 D2_8.4 D3_8.4 D4_8.4 D5_8.4 D6_8.4 | length 48.7
  Top Layer w0.254: D2_8.4 123.759,102.427 129.082,102.427 130.119,103.464 131.156,102.427 136.177,102.427 137.306,103.556 138.435,102.427 143.678,102.427 144.815,103.564 145.952,102.427 151.112,102.427 D6_8.4@152.277,103.592 ; 123.364,102.594 120.319,99.549 120.319,95.886 D2_7.2@125.488,90.717
RGB-IN_9: D2_8.2 D2_9.4 D3_9.4 D4_9.4 D5_9.4 D6_9.4 | length 49.3
  Top Layer w0.254: v1(124.095,110.595) 124.008,110.595 D2_9.4 123.746,110.857 129.069,110.857 130.106,111.894 131.143,110.857 136.164,110.857 137.293,111.986 138.422,110.857 143.665,110.857 144.802,111.994 145.939,110.857 151.099,110.857 D6_9.4@152.264,112.022 ; v1(124.408,100.478) D2_8.2
  Bottom Layer w0.254: v1(124.095,110.595) 124.145,110.595 126.087,108.653 126.087,102.008 v1@124.381,100.302
RGB-OUT_9: D2_9.2 D9.4 D10.4 | length 83.7
  Top Layer w0.254: D2_9.2 125.525,107.539 121.683,111.381 121.683,112.771 122.027,113.115 156.635,113.115 161.891,107.859 D9.4 163.324,84 167.951,84 D10.4
SCL: J1.2 J2.2 J3.7
SDA: J1.3 J2.3 J3.5
pads on no net: D3_0.2 D3_1.2 D3_2.2 D3_3.2 D3_4.2 D3_5.2 D3_6.2 D3_7.2 D3_8.2 D3_9.2 D4_0.2 D4_1.2 D4_2.2 D4_3.2 D4_4.2 D4_5.2 D4_6.2 D4_7.2 D4_8.2 D4_9.2 D5_0.2 D5_1.2 D5_2.2 D5_3.2 D5_4.2 D5_5.2 D5_6.2 D5_7.2 D5_8.2 D5_9.2 D6_0.2 D6_1.2 D6_2.2 D6_3.2 D6_4.2 D6_5.2 D6_6.2 D6_7.2 D6_8.2 D6_9.2 D7.2 D8.2 D10.2 M1.HOLE M2.HOLE M3.HOLE M4.HOLE